# Altium PCB PCB1.PcbDoc
Units mm, origin at the board's own origin, x right, y up, seen from the top; angles counter-clockwise.
Board outline 25.6 x 34.2 mm, 2 copper layers (Top Layer, Bottom Layer), stack 0.97 mm thick; 20 components, 19 nets, 74 pads, 6 vias.
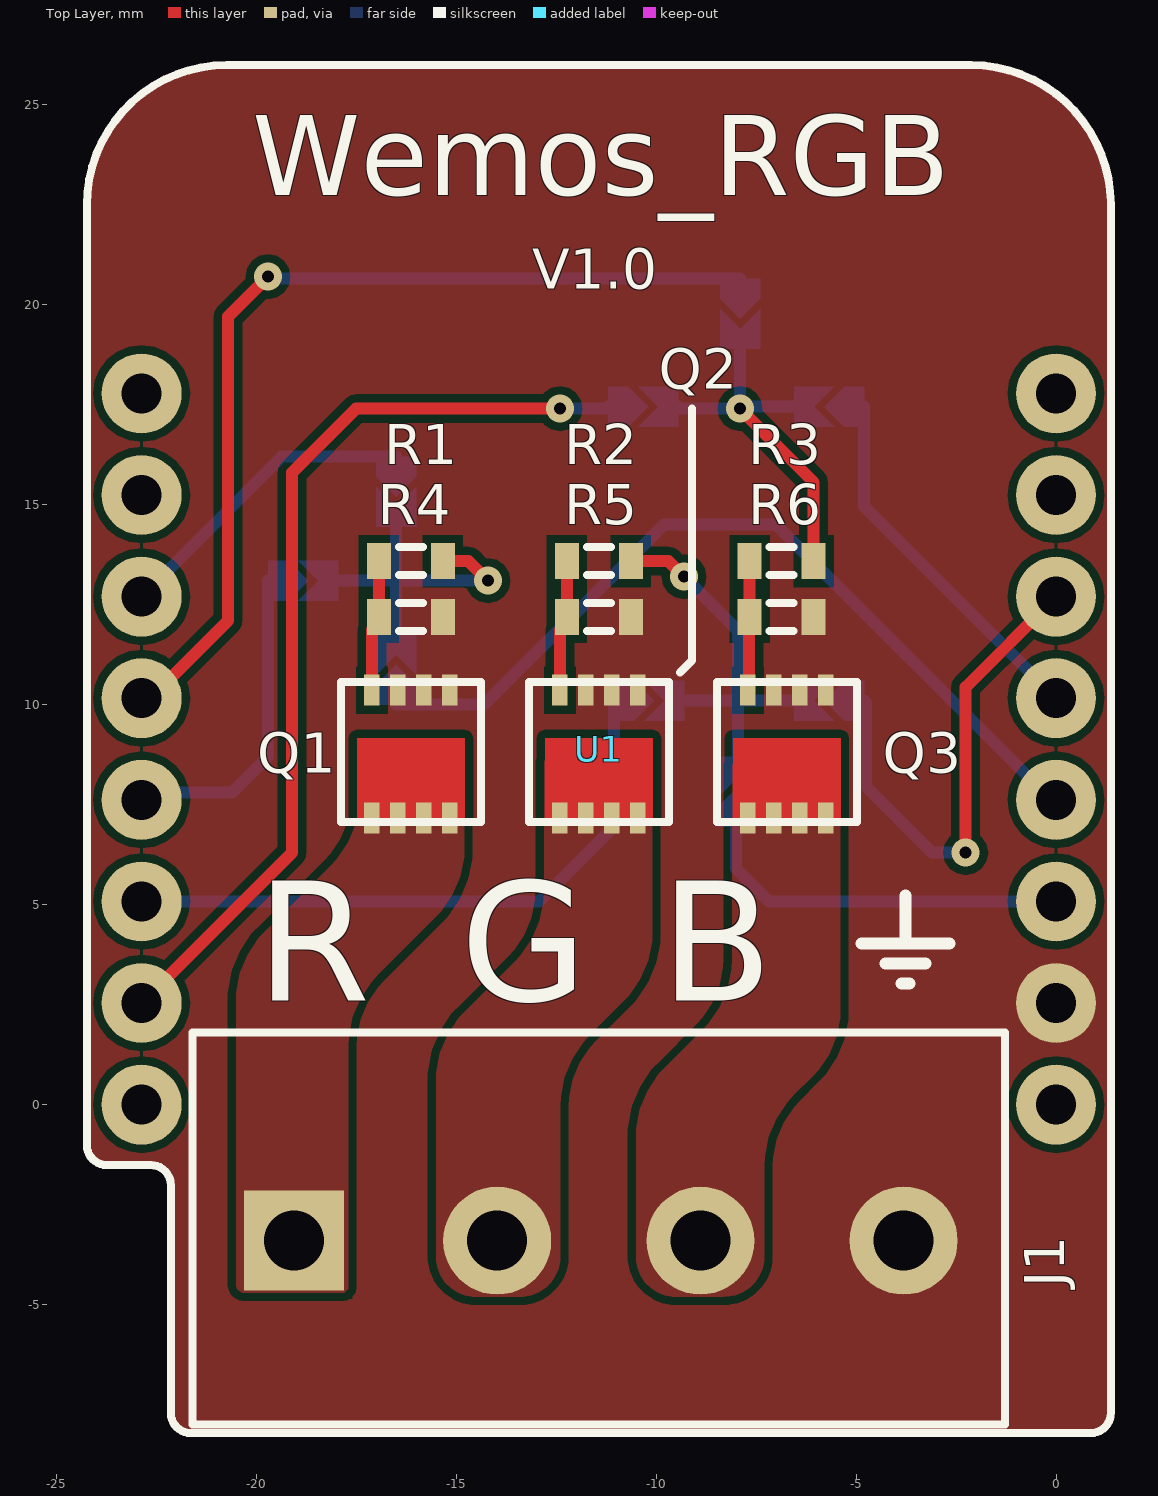
[diagram p0: Top Layer view]
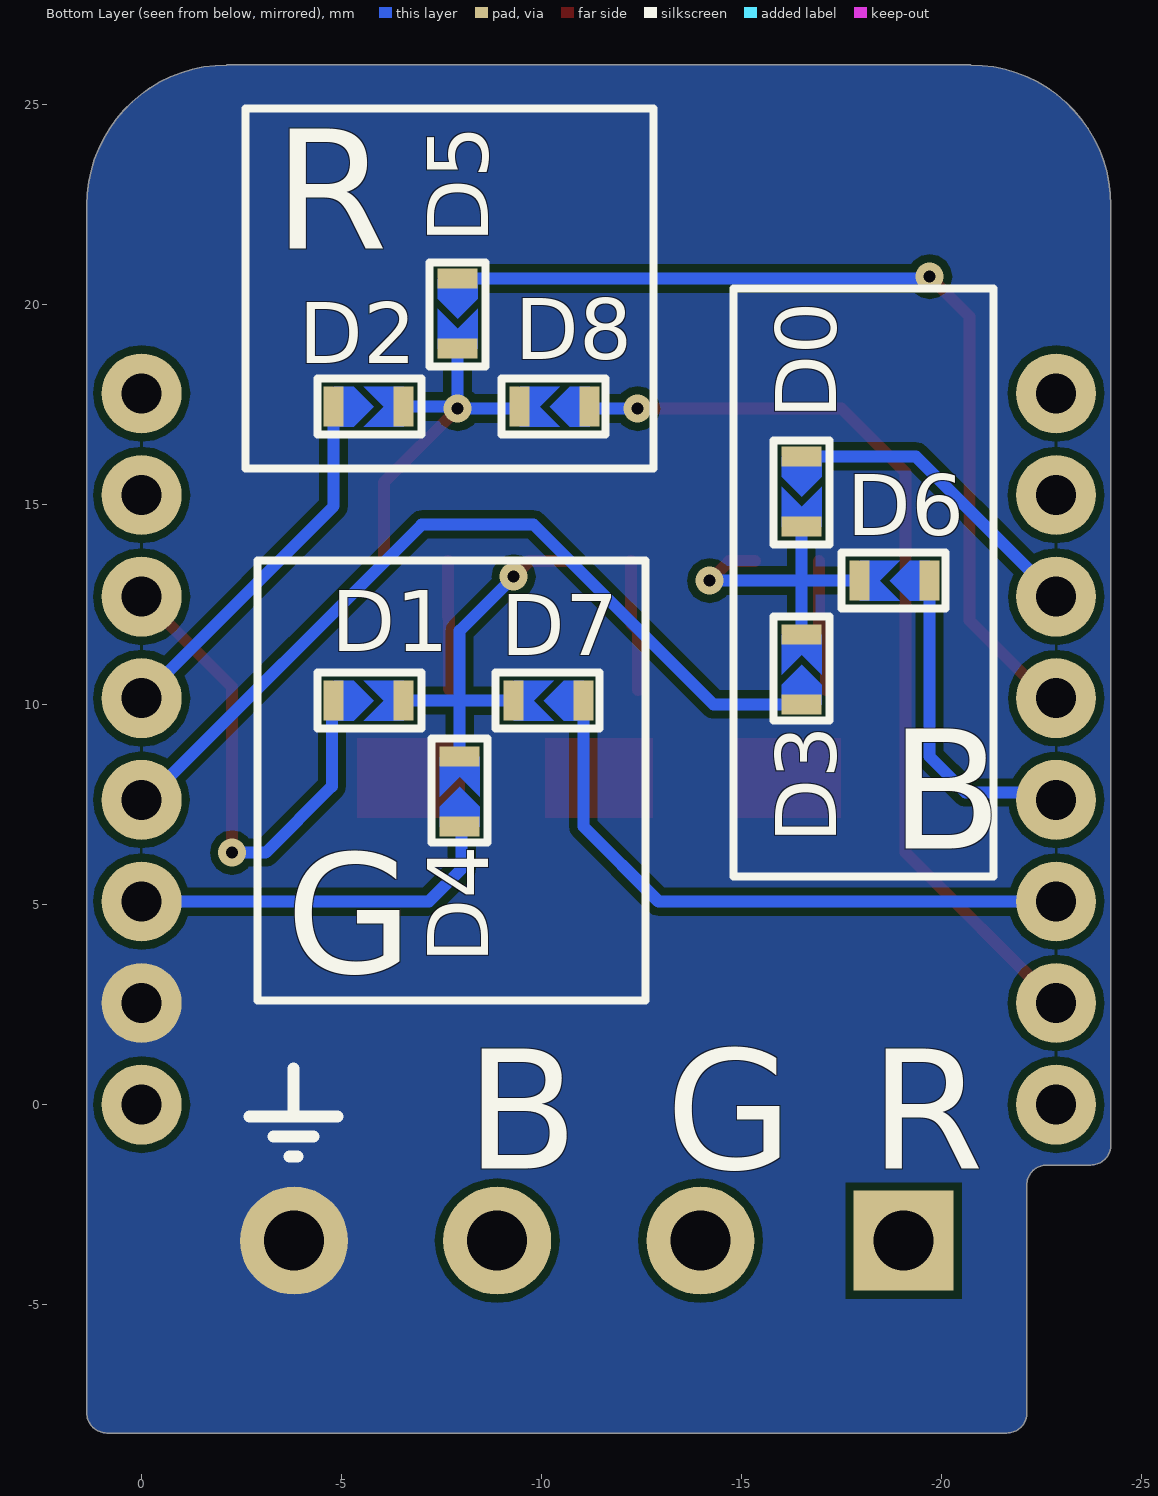
[diagram p1: Bottom Layer view, seen from below]
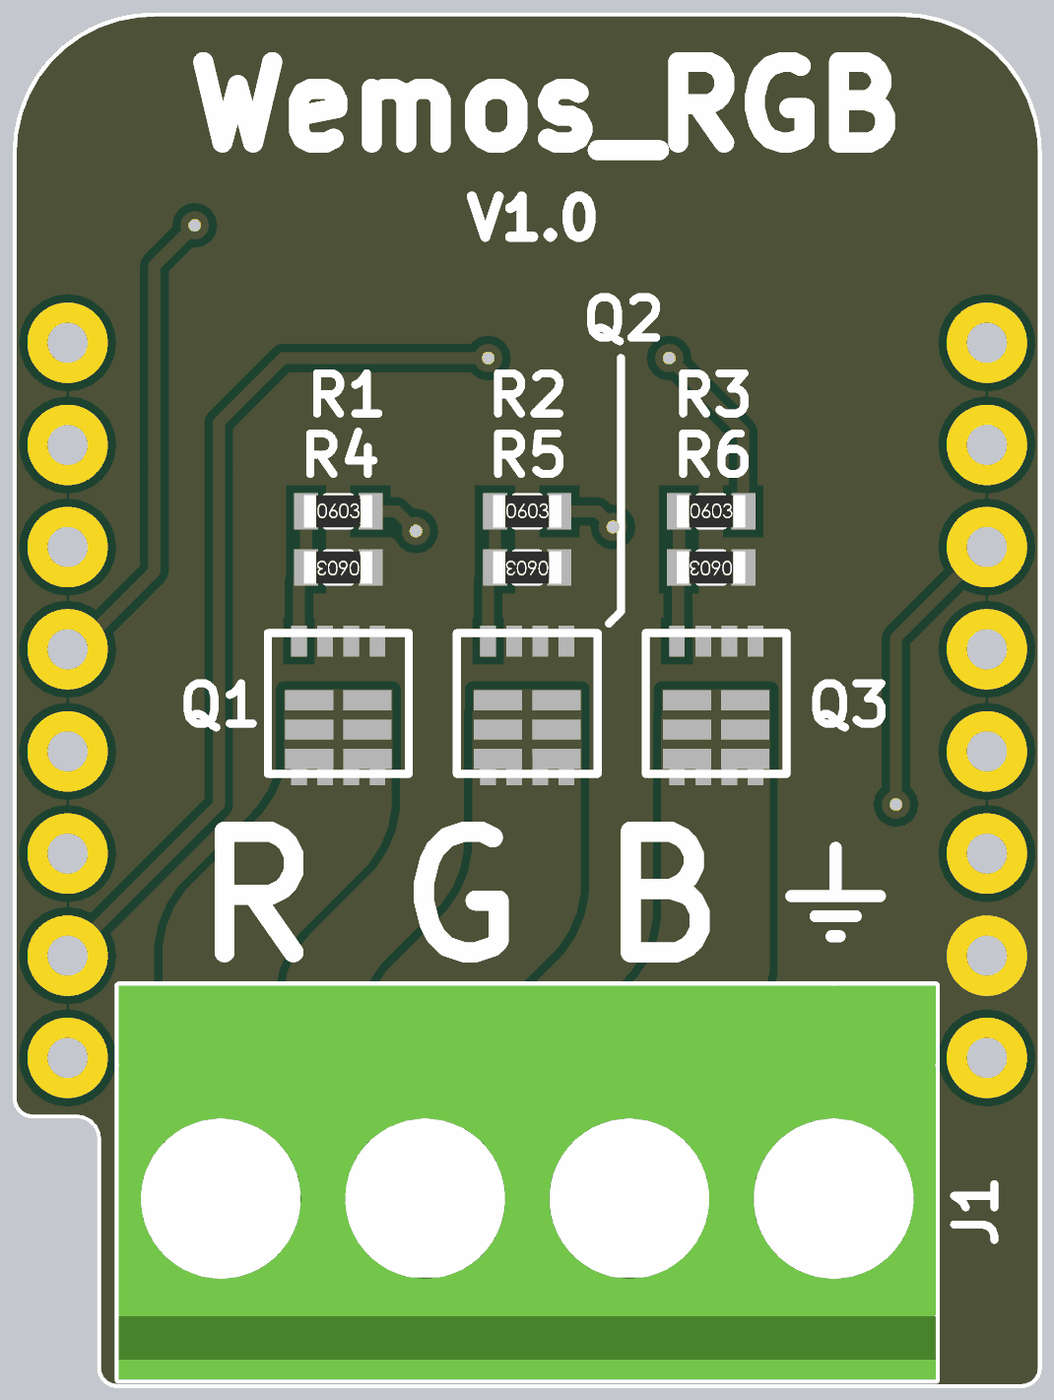
[diagram p2: 3D render of the assembled board from above, using the file's embedded part models]

## Layer stack, top to bottom
Top Solder: solder mask 0.0254, SM-001, Dk 4
Top Layer: signal copper 0.035
Dielectric 1: core 0.9, Core-043, Dk 4.3
Bottom Layer: signal copper 0.035
Bottom Solder: solder mask 0.0254, SM-001, Dk 4

## Board outline
-23.73,-1.51 -22.63,-1.51 cw(c-22.63,-2.01) -22.13,-2.01 -22.13,-7.71 ccw(c-21.63,-7.71) -21.63,-8.21 0.87,-8.21 ccw(c0.87,-7.71) 1.37,-7.71 1.37,22.49 ccw(c-2.13,22.49) -2.13,25.99 -2.13,25.995 -20.73,25.995 -20.73,25.99 ccw(c-20.73,22.49) -24.23,22.49 -24.23,-1.01 ccw(c-23.73,-1.01)

## Design rules (kind name [scope] priority, off if disabled: settings)
Clearance [All] p1: gap=0.2 ignorepadtopadclearanceinfootprint=FALSE
PolygonConnect PolygonConnect_1 [All vs InNet('Out 1') or InNet('Out 2') or InNet('Out 3') or InNet('GND')] p1: connectstyle=Direct reliefconductorwidth=0.254 reliefentries=4 polygonreliefangle="90 Angle" airgapwidth=0.254
PolygonConnect [All] p2: connectstyle=Relief reliefconductorwidth=0.254 reliefentries=4 polygonreliefangle="90 Angle" airgapwidth=0.254
RoutingVias [All] p1: holewidth=0.3 width=0.7 viastyle="Through Hole" minholewidth=0.2 minwidth=0.3 maxholewidth=1 maxwidth=2
SolderMaskExpansion [All] p1: expansion=0 istentingtop=FALSE
Width [All] p1: maxlimit=5 minlimit=0.254 preferedwidth=0.3
30 further rules are at their usual default settings.

## Components (designator, comment, footprint, x,y, rotation, side; value= is the part's Value field where it differs from the comment)
D0 "SWITCH_SOUDABLE" Switch_Soudable -16.5,15.2 r270 bottom
D1 "SWITCH_SOUDABLE" Switch_Soudable -5.8,10.1 r180 bottom
D2 "SWITCH_SOUDABLE" Switch_Soudable -5.8,17.45 r180 bottom
D3 "SWITCH_SOUDABLE" Switch_Soudable -16.5,11 r90 bottom
D4 "SWITCH_SOUDABLE" Switch_Soudable -7.95,7.95 r90 bottom
D5 "SWITCH_SOUDABLE" Switch_Soudable -7.9,19.65 r270 bottom
D6 "SWITCH_SOUDABLE" Switch_Soudable -18.7,13.1 r0 bottom
D7 "SWITCH_SOUDABLE" Switch_Soudable -10.05,10.1 r0 bottom
D8 "SWITCH_SOUDABLE" Switch_Soudable -10.2,17.45 r0 bottom
J1 "691242510004" 691242510004 -11.43,-3.1 r0 top locked
Q1 "18A_30V_0R01" PQFN8_3.3x3.3 -16.129,8.763 r0 top
Q2 "18A_30V_0R01" PQFN8_3.3x3.3 -11.43,8.763 r0 top
Q3 "18A_30V_0R01" PQFN8_3.3x3.3 -6.731,8.763 r0 top
R1 "100R_1%_0603" R0603 -16.129,13.589 r0 top
R2 "100R_1%_0603" R0603 -11.43,13.589 r0 top
R3 "100R_1%_0603" R0603 -6.858,13.589 r0 top
R4 "10k_1%_0603" R0603 -16.129,12.192 r180 top
R5 "10k_1%_0603" R0603 -11.43,12.192 r180 top
R6 "10k_1%_0603" R0603 -6.858,12.192 r180 top
U1 "Wemos_Shield" WEMOS_D1_MINI -11.43,8.89 r0 top locked

## Footprints (in the part's own frame and the unit in brackets; to place one, negate y for a bottom-side part, rotate by r counter-clockwise, add the part's x,y. Pads: shape width x height; smd on the part's side, far side on the other; paste and mask are expansions set on the pad)
691242510004 [mm] "Serie 2425 - 5.08 mm _ 4 pins"
  rect 2.5x2.5 hole 1.5: 1(-7.62,-0.3)
  round 2.7 hole 1.5: 2(-2.54,-0.3) 3(2.54,-0.3) 4(7.62,-0.3)
  silkscreen extent -10.16,-4.9 10.16,4.9, body extent -10.16,-4.9 10.16,4.9, height 13.85
PQFN8_3.3x3.3 [mm]
  rect 0.39x0.77 smd: 1(0.975,1.6) 2(0.325,1.6) 3(-0.325,1.6) 4(-0.975,1.6) 5(-0.975,-1.6) 6(-0.325,-1.6) 7(0.325,-1.6) 8(0.975,-1.6)
  Top Layer region: -1.35,-1.6 1.35,-1.6 1.35,0.4 -1.35,0.4
  silkscreen extent -1.75,-1.7 1.75,1.8, body extent -1.65,-1.6 1.68,1.73, height 1
R0603 [mm] "Resistor CMS 0603 (1608)"
  rect 0.6x0.9 smd: 1(-0.8,0) 2(0.8,0)
  silkscreen extent -0.3,-0.35 0.3,0.35, body extent -0.85,-0.4 0.85,0.4, height 0.56
Switch_Soudable [mm]
  rect 0.5x1 smd paste-1: 0(0.75,0) 1(-1,0)
  Top Layer region: -0.5,0.5 0,0 -0.5,-0.5 -1,-0.5 -1,0.5
  Top Layer region: -0.25,0.5 0.25,0 -0.25,-0.5 0.75,-0.5 0.75,0.5
  silkscreen extent -1.4,-0.7 1.2,0.7
WEMOS_D1_MINI [mm]
  round 2 hole 1: 1(-11.43,8.89) 2(-11.43,6.35) 3(-11.43,3.81) 4(-11.43,1.27) 5(-11.43,-1.27) 6(-11.43,-3.81) 7(-11.43,-6.35) 8(-11.43,-8.89) 9(11.43,-8.89) 10(11.43,-6.35) 11(11.43,-3.81) 12(11.43,-1.27) 13(11.43,1.27) 14(11.43,3.81) 15(11.43,6.35) 16(11.43,8.89)
  silkscreen extent -12.8,-17.1 12.8,17.11

## Part data
J1: "WR-TBL Serie 2425 Horizontal Entry Modular, Rising Cage Clamp, pitch 5.08mm, 4p", Operating Temperature="-30 to +120degC", Rated Current [UL]=14A, Working Voltage [UL]=300VAC, Application="Rising Cage Clamp", Compliance="ROHS & Reach", ComponentLink1Description=Manufacturer, ComponentLink1URL=http://www.we-online.de, ComponentLink2Description=Datasheet, ComponentLink2URL=https://katalog.we-online.de/em/datasheet/691242510004.pdf, Modularity=No, Mounting Technology=THT, Packaging=Box, Part Number=691242510004, PCB/Cable/Panel=PCB, Pin Number=4, Pitch=5.08mm, Published Date="October 2019", Publisher="Wurth Elektronik", Type=Horizontal
Q1 Q2 Q3: library part MOSFET-N, "N-Channel MOSFET", MPN=IRFHM8337, Supplier Part Number 1=2839488, MF=INFINEON, Supplier 1=Farnell, Supplier Pricing 1=0.307€
R1 R2 R3: library part RES, "Resistor", MPN=MCWR06X1000FTL, Supplier Part Number 1=2447227, MF=MULTICOMP, Supplier 1=Farnell, Supplier Pricing 1="0.0049 €"
R4 R5 R6: library part RES, "Resistor", MPN=MCWR06X1002FTL, Supplier Part Number 1=2447230, MF=MULTICOMP, Supplier 1=Farnell, Supplier Pricing 1="0.0043 €"
U1: library part ESP8266

## Via types
v1: diameter 0.7, hole 0.3, Top Layer to Bottom Layer, tented both sides, 6 vias

## Nets (pads, with @x,y where several pads share a name; then routed paths per layer and width w, separated by ;. In a path a pad name is that pad's centre, name@x,y a point inside that pad or via, vN(x,y) a via of type N, cw(c..) or ccw(c..) an arc to the next point about the centre after c; other vN are vias at no path point)
Blue: D1.0 D4.0 D7.0 R2.2 | length 9.3
  Top Layer w0.3: R2.2 -9.689,13.589 v1(-9.3,13.2)
  Bottom Layer w0.3: D7.0 -7.95,10.1 ; v1(-9.3,13.2) -7.95,11.85 -7.95,10.275 -7.95,10.1 ; D4.0 -7.95,10.1 ; D1.0 -7.95,10.1
D0: D0.1 U1.3 | length 7.8
  Bottom Layer w0.3: U1.3 -19.36,16.2 D0.1
D1: D1.1 U1.14 | length 12.7
  Top Layer w0.3: v1(-2.261,6.3) -2.261,10.439 U1.14
  Bottom Layer w0.3: D1.1 -4.757,10.057 -4.757,7.957 -3.1,6.3 v1(-2.261,6.3)
D2: D2.1 U1.13 | length 9.3
  Bottom Layer w0.3: D2.1 -4.8,14.96 U1.13
D3: D3.1 U1.12 | length 21.2
  Bottom Layer w0.3: D3.1 -15.6,10 -14.3,10 -9.8,14.5 -7,14.5 -0.12,7.62 U1.12
D4: D4.1 U1.11 | length 9.4
  Bottom Layer w0.3: D4.1 -8,6.9 -8,5.9 -7.18,5.08 U1.11
D5: D5.1 U1.4 | length 23.8
  Top Layer w0.3: U1.4 -22.64,10.16 -20.7,12.1 -20.7,19.7 v1(-19.7,20.7)
  Bottom Layer w0.3: v1(-19.7,20.7) -19.65,20.65 D5.1
D6: D6.1 U1.5 | length 8
  Bottom Layer w0.3: U1.5 -22.68,7.8 -20.6,7.8 -19.7,8.7 D6.1
D7: D7.1 U1.6 | length 15.7
  Bottom Layer w0.3: U1.6 -12.92,5.08 -11.05,6.95 D7.1
D8: D8.1 U1.7 | length 23.4
  Top Layer w0.3: U1.7 -19.1,6.3 -19.1,15.8 -17.5,17.4 v1(-12.4,17.4)
  Bottom Layer w0.3: v1(-12.4,17.4) -11.25,17.4 D8.1
GND: J1.4 Q1.1 Q1.2 Q1.3 Q2.1 Q2.2 Q2.3 Q3.1 Q3.2 Q3.3 R4.1 R5.1 R6.1 U1.10
Green: D2.0 D5.0 D8.0 R3.2 | length 9
  Top Layer w0.3: v1(-7.9,17.4) -6.058,15.558 R3.2
  Bottom Layer w0.3: D8.0 ccw(c-9.329,17.571) -9.329,17.4 v1(-7.9,17.4) ; D5.0 v1(-7.9,17.4) ; D2.0 -7.779,17.45 ccw(c-7.779,17.279) v1(-7.9,17.4)
NetQ1_4: Q1.4 R1.1 R4.2 | length 3.3
  Top Layer w0.3: Q1.4 -17.104,11.867 -16.929,12.042 R4.2 R1.1
NetQ2_4: Q2.4 R2.1 R5.2 | length 3.3
  Top Layer w0.3: Q2.4 -12.405,11.867 -12.23,12.042 R5.2 R2.1
NetQ3_4: Q3.4 R3.1 R6.2 | length 3.2
  Top Layer w0.3: Q3.4 -7.682,10.387 -7.682,12.168 R6.2 R3.1
"Out 1": J1.1 Q1.5 Q1.6 Q1.7 Q1.8
"Out 2": J1.2 Q2.5 Q2.6 Q2.7 Q2.8
"Out 3": J1.3 Q3.5 Q3.6 Q3.7 Q3.8
Red: D0.0 D3.0 D6.0 R1.2 | length 7.8
  Top Layer w0.3: R1.2 -14.689,13.589 v1(-14.2,13.1)
  Bottom Layer w0.3: D6.0 -16.5,13.1 ; D3.0 -16.5,13.1 ; D0.0 -16.5,13.1 ; v1(-14.2,13.1) -16.5,13.1
pads on no net: U1.1 U1.2 U1.8 U1.9 U1.15 U1.16

## Polygon pours and split planes (outlines as drawn)
GND on Top Layer "GND_L01_P019" (solid, pour order 19): -22.63,-1.51 cw(c-22.63,-2.01) -22.13,-2.01 -22.13,-7.71 ccw(c-21.63,-7.71) -21.63,-8.21 0.87,-8.21 ccw(c0.87,-7.71) 1.37,-7.71 1.37,22.49 ccw(c-2.13,22.49) -2.13,25.99 -2.13,25.995 -20.73,25.995 -20.73,25.99 ccw(c-20.73,22.49) -24.23,22.49 -24.23,-1.01 ccw(c-23.73,-1.01) -23.73,-1.51
"Out 1" on Top Layer "OUT_1_L01_P016" (solid, pour order 16): -17.4,8.4 -17.4,7.752 cw(c-19.94,7.752) -18.144,5.956 -19.756,4.344 ccw(c-17.96,2.548) -20.5,2.548 -20.5,-4.5 ccw(c-20.3,-4.5) -20.3,-4.7 -17.8,-4.7 ccw(c-17.8,-4.6) -17.7,-4.6 -17.7,1.448 cw(c-15.16,1.448) -16.956,3.244 -15.544,4.656 ccw(c-17.34,6.452) -14.8,6.452 -14.8,8.4
"Out 2" on Top Layer "OUT_2_L01_P018" (solid, pour order 18): -12.8,8.6 -12.8,5.352 cw(c-15.34,5.352) -13.544,3.556 -14.756,2.344 ccw(c-12.96,0.548) -15.5,0.548 -15.5,-3.8 ccw(c-14.5,-3.8) -14.5,-4.8 -13.4,-4.8 ccw(c-13.4,-3.8) -12.4,-3.8 -12.4,-0.052 cw(c-9.86,-0.052) -11.656,1.744 -10.844,2.556 ccw(c-12.64,4.352) -10.1,4.352 -10.1,8.6
"Out 3" on Top Layer "OUT_3_L01_P017" (solid, pour order 17): -5.4,8.5 -5.4,2.39 cw(c-7.79,2.39) -6.1,0.7 -6.556,0.244 ccw(c-4.76,-1.552) -7.3,-1.552 -7.3,-3.8 cw(c-8.3,-3.8) -8.3,-4.8 -9.5,-4.8 cw(c-9.5,-3.8) -10.5,-3.8 -10.5,-0.852 cw(c-7.96,-0.852) -9.756,0.944 -8.844,1.856 ccw(c-10.64,3.652) -8.1,3.652 -8.1,8.5
GND on Bottom Layer "GND_L02_P020" (solid, pour order 20): -22.63,-1.51 cw(c-22.63,-2.01) -22.13,-2.01 -22.13,-7.71 ccw(c-21.63,-7.71) -21.63,-8.21 0.87,-8.21 ccw(c0.87,-7.71) 1.37,-7.71 1.37,22.49 ccw(c-2.13,22.49) -2.13,25.99 -2.13,25.995 -20.73,25.995 -20.73,25.99 ccw(c-20.73,22.49) -24.23,22.49 -24.23,-1.01 ccw(c-23.73,-1.01) -23.73,-1.51

## Silkscreen, mask and mechanical layers (free items; w line width, h text height)
Top Overlay:
  lines w0.2: -9.4,10.8 -9.1,11.1 -9.1,17.4 ; -4.861,4.024 -3.761,4.024
  lines w0.3: -4.861,4.024 -2.661,4.024 ; -4.261,3.524 -3.261,3.524 ; -3.861,3.024 -3.661,3.024 ; -3.761,4.024 -3.761,5.224
  text "Wemos_RGB" at -20.1,22.733 h2
  text "V1.0" at -13.1,20.4 h1
  text "R" at -20,2.6 h3
  text "G" at -14.9,2.6 h3
  text "B" at -9.9,2.6 h3
Bottom Overlay:
  lines w0.2: -3.8,-0.3 -2.7,-0.3 ; -21.3,5.7 -14.8,5.7 -14.8,20.4 -21.3,20.4 -21.3,5.7 ; -12.8,15.9 -2.6,15.9 -2.6,24.9 -12.8,24.9 -12.8,15.9 ; -12.6,2.6 -2.9,2.6 -2.9,13.6 -12.6,13.6 -12.6,2.6
  lines w0.3: -4.9,-0.3 -2.7,-0.3 ; -4.3,-0.8 -3.3,-0.8 ; -3.9,-1.3 -3.7,-1.3 ; -3.8,-0.3 -3.8,0.9
  text "R" at -3.3,21.4 h3
  text "B" at -18.7,6.4 h3
  text "G" at -3.6,3.3 h3
  text "R" at -18.2,-1.6 h3
  text "G" at -13.1,-1.6 h3
  text "B" at -8.1,-1.6 h3